# EAGLE board supply LF (EAGLE 7.5.0)
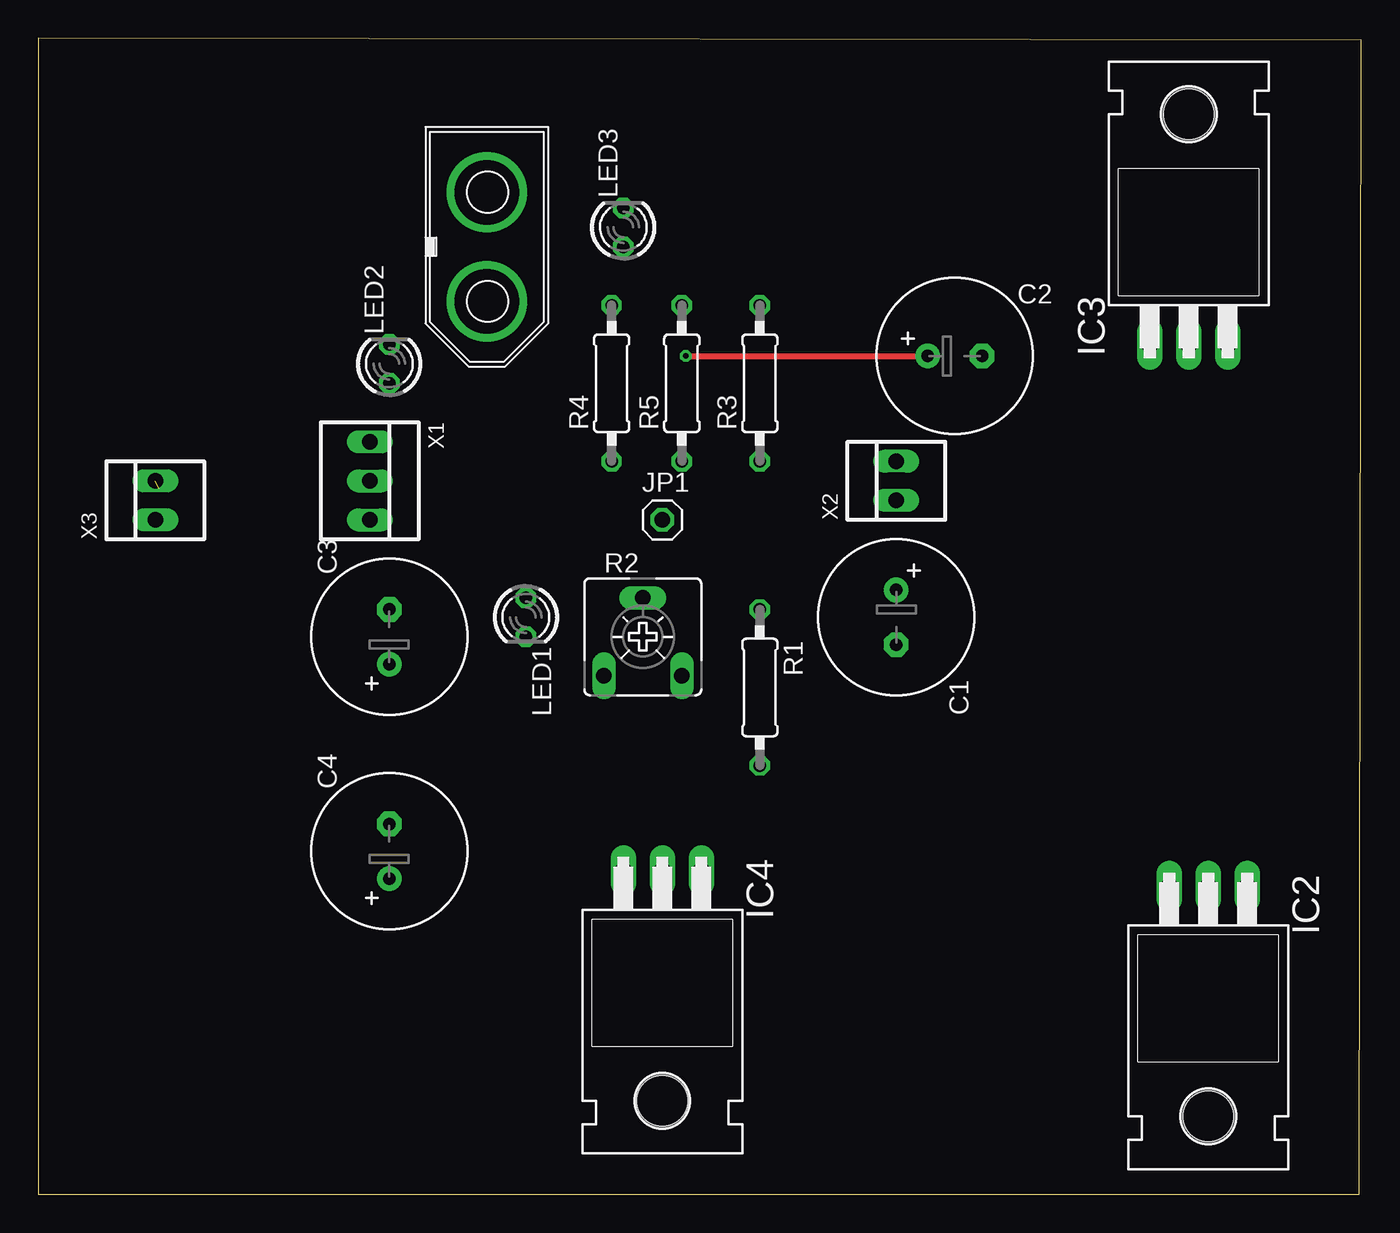
[diagram p0: board, top side]
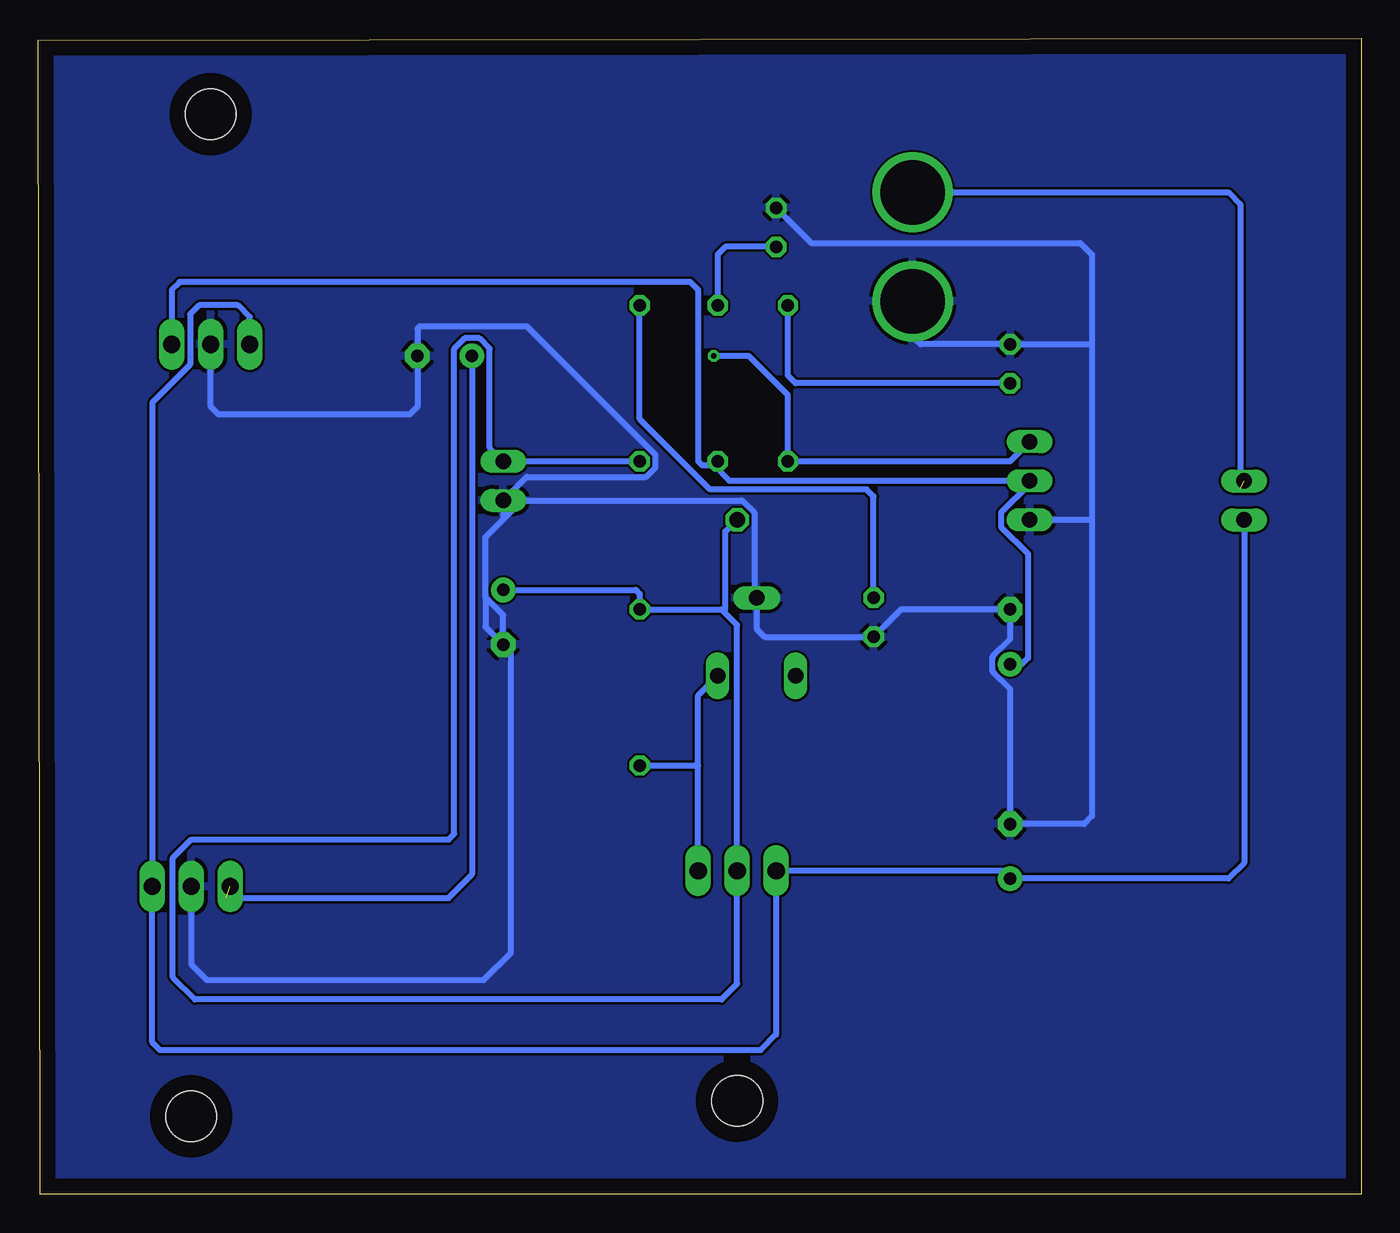
[diagram p1: board, bottom side, seen from below]

Size 86.16 x 75.3 mm. Coordinates in mm from the lower left corner, seen from the top.
Outline: 0,0 86.03,0 86.16,75.17 0,75.3 0,0
Copper layers (1*16): Top 0.035mm / dielectric 1.5mm / Bottom 0.035mm
Design rules "default": minimum track width 6mil, minimum drill 0.35mm, track to track 6mil, track to pad 6mil, pad to pad 6mil, via to via 6mil, smd to smd 6mil, copper to edge 40mil, drill to drill 6mil, minimum pad ring 10mil, minimum via ring 8mil, stop-mask expansion 4mil, vias tented up to drill 0mil, thermal gap 10mil

## Footprints (pad centres in the part's own frame; a part is rotated, then mirrored left to right if it is on the bottom)
E3,5-10 = drill 0.813 pad 1.6: + -1.778,0 | drill 0.813 pad 1.6 octagon: - 1.778,0
TO220H = drill 1.118 long: 1 -2.54,-10.16; 2 0,-10.16; 3 2.54,-10.16 | hole 3.302: 0,4.826
1X01 = drill 1.016 octagon: 1 0,0
LED3MM = drill 0.813 octagon: A -1.27,0; K 1.27,0
0207/10 = drill 0.813 octagon: 1 -5.08,0; 2 5.08,0
CA6V = drill 1.016 long: A -2.54,-2.54; E 2.54,-2.54; S 0,2.54
CON-XT60M = drill 4.2: V+ -3.55,0; V- 3.55,0
22-23-2031 = drill 1 long: 1 -2.54,0; 2 0,0; 3 2.54,0
22-23-2021 = drill 1 long: 1 -1.27,0; 2 1.27,0

## Placement (x,y rotation side)
C1  1000uF/16V  [E3,5-10]  55.88,37.59 270 top
C2  1000uF/16V  [E3,5-10]  59.69,54.61 0 top
C3  1000uF/16V  [E3,5-10]  22.86,36.32 90 top
C4  1000uF/16V  [E3,5-10]  22.86,22.35 90 top
IC2  7805T  [TO220H]  76.2,9.91 180 top
IC3  7805T  [TO220H]  74.93,65.53 0 top
IC4  317T  [TO220H]  40.64,10.92 180 top
JP1  [1X01]  40.64,43.94 0 top
LED1  [LED3MM]  31.75,37.59 270 top
LED2  [LED3MM]  22.86,54.1 90 top
LED3  [LED3MM]  38.1,62.99 90 top
R1  1K2  [0207/10]  46.99,33.02 270 top
R2  20K  [CA6V]  39.37,36.32 0 top
R3  1K  [0207/10]  46.99,52.83 90 top
R4  1K  [0207/10]  37.34,52.83 90 top
R5  1K  [0207/10]  41.91,52.83 90 top
VIN  [CON-XT60M]  29.21,61.72 270 top
X1  VSYS  [22-23-2031]  21.59,46.48 270 top
X2  VMOT  [22-23-2021]  55.88,46.48 90 top
X3  switch  [22-23-2021]  7.62,45.21 90 top

## Library data of the parts
C1-C4 R1 R3-R5 = rcl
IC2-IC4 = linear
JP1 = pinhead
LED1-LED3 = led
R2 = pot
VIN = con-XT60M
X1 = con-molex; MF: MOLEX; MPN: 22-23-2031; OC_FARNELL: 1462950; OC_NEWARK: 30C0862
X2 X3 = con-molex; MF: MOLEX; MPN: 22-23-2021; OC_FARNELL: 1462926; OC_NEWARK: 25C3832

## Nets
+12V: C3.+ IC3.3 R5.1 X1.2
GND: C1.- C2.- C3.- C4.- IC2.2 IC3.2 LED1.K LED2.K LED3.K R2.S VIN.V- X1.3 X2.1
N$1: IC4.1 R1.2 R2.E
N$2: LED1.A R3.2
N$3: LED3.A R5.2
N$4: VIN.V+ X3.2
N$5: LED2.A R4.2
VCC: C2.+ IC2.3 R4.1 X1.1
VDD: C1.+ IC4.2 JP1.1 R1.1 R3.1 X2.2
VPP: C4.+ IC2.1 IC3.1 IC4.3 X3.1

## Tracks (layer width: path | path; a pad name or v marks a point on that pad's centre or on a via)
+12V
  Bottom 0.406: 42.16,47.5 42.93,47.5 43.18,47.75 43.18,58.93 43.69,59.44 76.96,59.44 77.47,58.93 IC3.3 | 42.16,47.5 R5.1 | C3.+ 22.1,34.54 21.7,34.94 21.7,41.73 23.45,43.48 23.45,44.4 21.59,46.26 X1.2 41.15,46.48 42.16,47.5
GND
  Bottom 0.406: IC2.2 76.2,14.99 75.18,13.97 57.15,13.97 55.37,15.75 55.37,35.31 C1.- | 17.53,55.37 17.53,43.94 | 17.53,43.94 X1.3 | C1.- 55.75,35.69 | 55.88,43.97 X2.1 54.36,46.74 46.57,46.74 45.97,47.33 45.97,48.17 54.33,56.53 61.33,56.53 61.47,56.39 C2.- 61.47,51.31 61.98,50.8 74.42,50.8 74.93,51.31 IC3.2 | C1.- 57.04,36.97 57.04,38.89 | 55.88,43.97 57.04,42.81 57.04,38.89 | 55.88,43.97 54.64,45.21 40.33,45.21 39.52,44.41 39.52,39.01 R2.S 39.37,36.83 38.86,36.32 LED1.K 29.97,38.1 C3.- 22.86,36.18 24.02,35.02 24.02,34.06 22.86,32.91 C4.- 18.03,24.13 17.53,24.64 17.53,43.94 | C1.- 55.88,37.74 57.04,38.89 | VIN.V- 29.21,55.88 28.7,55.37 LED2.K 17.53,55.37 | LED3.K 35.81,61.98 18.29,61.98 17.53,61.21 17.53,55.37
  pour Bottom: 0,75.18 86.11,75.18 86.11,0 0,0
N$1
  Bottom 0.406: IC4.1 43.18,27.94 | 43.18,27.94 43.18,32.51 R2.E | R1.2 43.18,27.94
N$2
  Bottom 0.406: LED1.A 31.75,45.47 32.21,45.92 42.39,45.92 46.99,50.52 R3.2
N$3
  Bottom 0.406: LED3.A 41.4,61.72 41.91,61.21 R5.2
N$4  (1 unrouted)
  Bottom 0.406: VIN.V+ 8.63,65.27 7.87,64.52 7.87,45.97
N$5
  Bottom 0.406: LED2.A 36.83,52.83 37.34,53.34 R4.2
VCC  (via drill 0.35)  (1 unrouted)
  Top 0.406: v42.16,54.61 C2.+
  Bottom 0.406: C2.+ 57.91,20.83 59.44,19.3 73.91,19.3 | X1.1 22.86,47.75 R4.1 37.34,52.07 39.88,54.61 v42.16,54.61
VDD
  Bottom 0.406: 41.66,38.1 40.64,37.08 IC4.2 40.64,13.72 41.66,12.7 75.95,12.7 77.39,14.15 77.39,21.92 76.2,23.11 59.44,23.11 59.07,23.48 59.07,55.09 58.39,55.77 57.43,55.77 56.76,55.09 56.76,48.63 X2.2 R3.1 | JP1.1 41.4,43.18 41.4,38.1 41.66,38.1 | 41.66,38.1 R1.1 46.99,39.12 47.24,39.37 C1.+
VPP
  Bottom 0.406: IC3.1 72.39,57.15 73.15,57.91 75.69,57.91 76.28,57.33 76.28,54.04 78.74,51.58 IC2.1 78.74,9.91 78.23,9.4 39.12,9.4 38.1,10.41 IC4.3 23.37,21.08 C4.+ 8.64,20.57 7.62,21.59 X3.1